# Altium PCB POSEDGE_wing_8_template.PcbDoc
Units mil, origin at the board's own origin, x right, y up, seen from the top; angles counter-clockwise.
Board outline 1968.5 x 800 mil, 2 copper layers (Top Layer, Bottom Layer); 1 components, 2 nets, 12 pads, 0 vias.
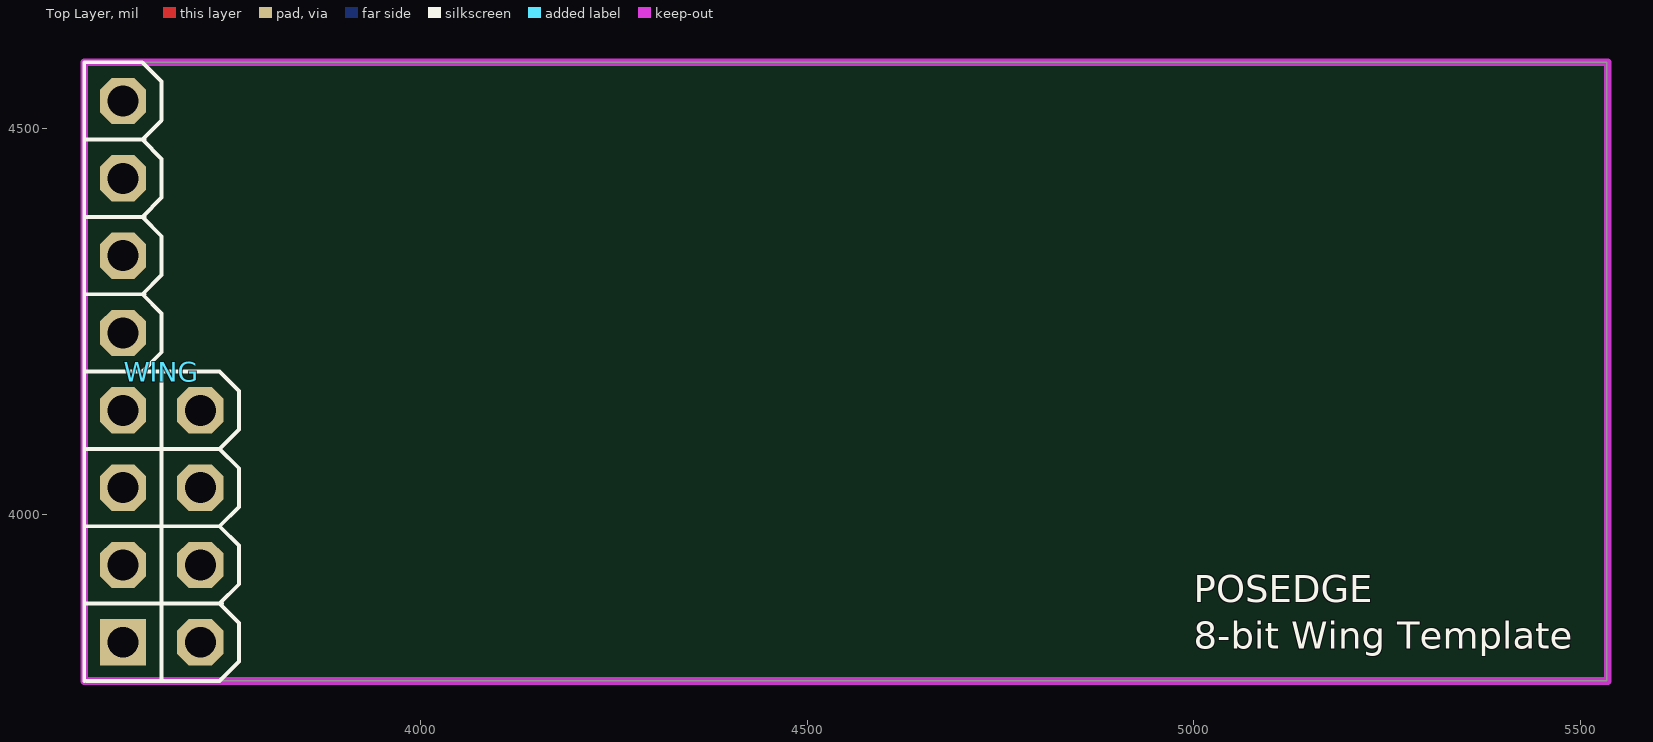
[diagram p0: Top Layer view]
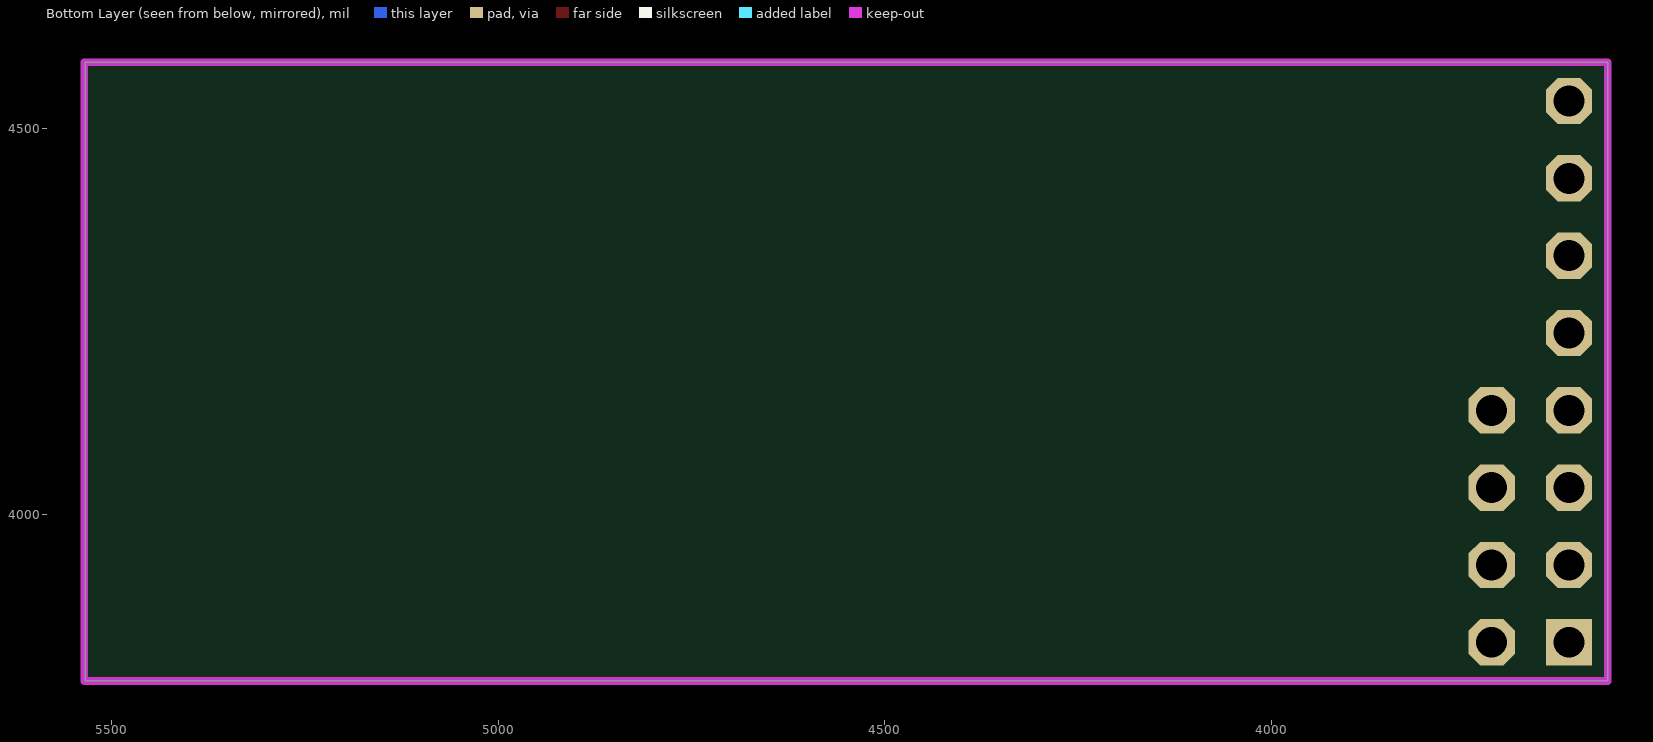
[diagram p1: Bottom Layer view, seen from below]

## Layer stack, top to bottom
Top Solder: solder mask 0.4, Solder Resist, Dk 3.5
Top Layer: signal copper 1.4
Dielectric 1: dielectric 12.6, FR-4, Dk 4.8
Bottom Layer: signal copper 1.4
Bottom Solder: solder mask 0.4, Solder Resist, Dk 3.5

## Board outline
3565,3785 5533.5,3785 5533.5,4585 3565,4585

## Design rules (kind name [scope] priority, off if disabled: settings)
Clearance [All] p1: gap=10
PolygonConnect [All] p1: connectstyle=Relief reliefconductorwidth=10 reliefentries=4 polygonreliefangle="90 Angle" airgapwidth=10
RoutingVias [All] p1: holewidth=28 width=50 viastyle="Through Hole" minholewidth=28 minwidth=50 maxholewidth=28 maxwidth=50
SolderMaskExpansion [All] p1: expansion=4
Width [All] p1: maxlimit=10 minlimit=10 preferedwidth=10
30 further rules are at their usual default settings.

## Components (designator, comment, footprint, x,y, rotation, side; value= is the part's Value field where it differs from the comment)
WING "WING8" WINGSIDE_8BIT 3565,4585 r270 top locked

## Footprints (in the part's own frame and the unit in brackets; to place one, negate y for a bottom-side part, rotate by r counter-clockwise, add the part's x,y. Pads: shape width x height; smd on the part's side, far side on the other; paste and mask are expansions set on the pad)
WINGSIDE_8BIT [mil]
  rect 60x60 hole 40: 0(750,50)
  oct 60x60 hole 40: 1(650,50) 2(550,50) 2V5@2(650,150) 3(450,50) 3V3@2(550,150) 4(350,50) 5(250,50) 5V@2(450,150) 6(150,50) 7(50,50) GND@2(750,150)
  silkscreen extent 0,0 800,200

## Nets (pads, with @x,y where several pads share a name; then routed paths per layer and width w, separated by ;. In a path a pad name is that pad's centre, name@x,y a point inside that pad or via, vN(x,y) a via of type N, cw(c..) or ccw(c..) an arc to the next point about the centre after c; other vN are vias at no path point)
GND: WING.GND@2
VCC3V3: WING.3V3@2
pads on no net: WING.0 WING.1 WING.2 WING.2V5@2 WING.3 WING.4 WING.5 WING.5V@2 WING.6 WING.7

## Keep-outs
Keep-Out Layer:
  lines w10: 3565,3785 5535,3785 5535,4585 3565,4585 3565,3785

## Silkscreen, mask and mechanical layers (free items; w line width, h text height)
Top Overlay:
  text "POSEDGE  / 8-bit Wing Template" at 5000,3815 h60

## Dimensions
5535,4585 to 5535,3785 on Mechanical 1
3565,3770 to 5535,3785 on Mechanical 1